# Altium PCB PCB_LSH-120.PcbDoc
Units mil, origin at the board's own origin, x right, y up, seen from the top; angles counter-clockwise.
Board outline 1950 x 3050 mil, 2 copper layers (Top Layer, Bottom Layer), stack 62.8 mil thick; 33 components, 47 nets, 171 pads, 35 vias.
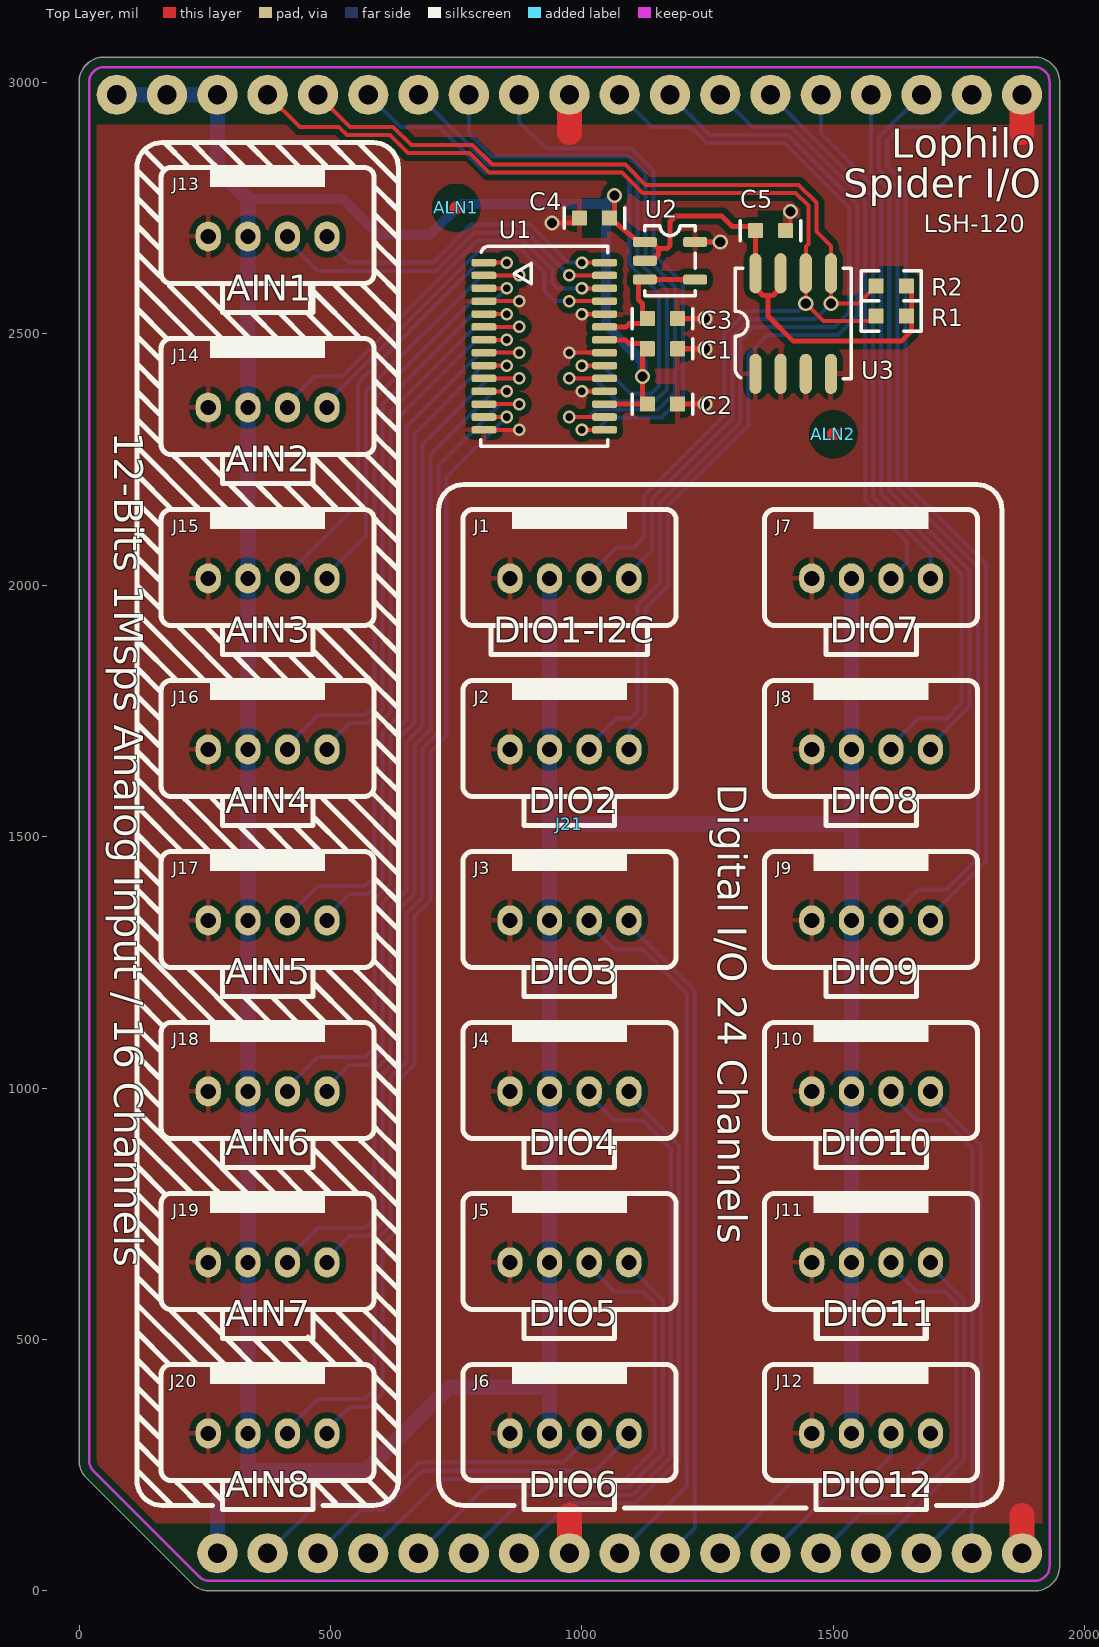
[diagram p0: Top Layer view]
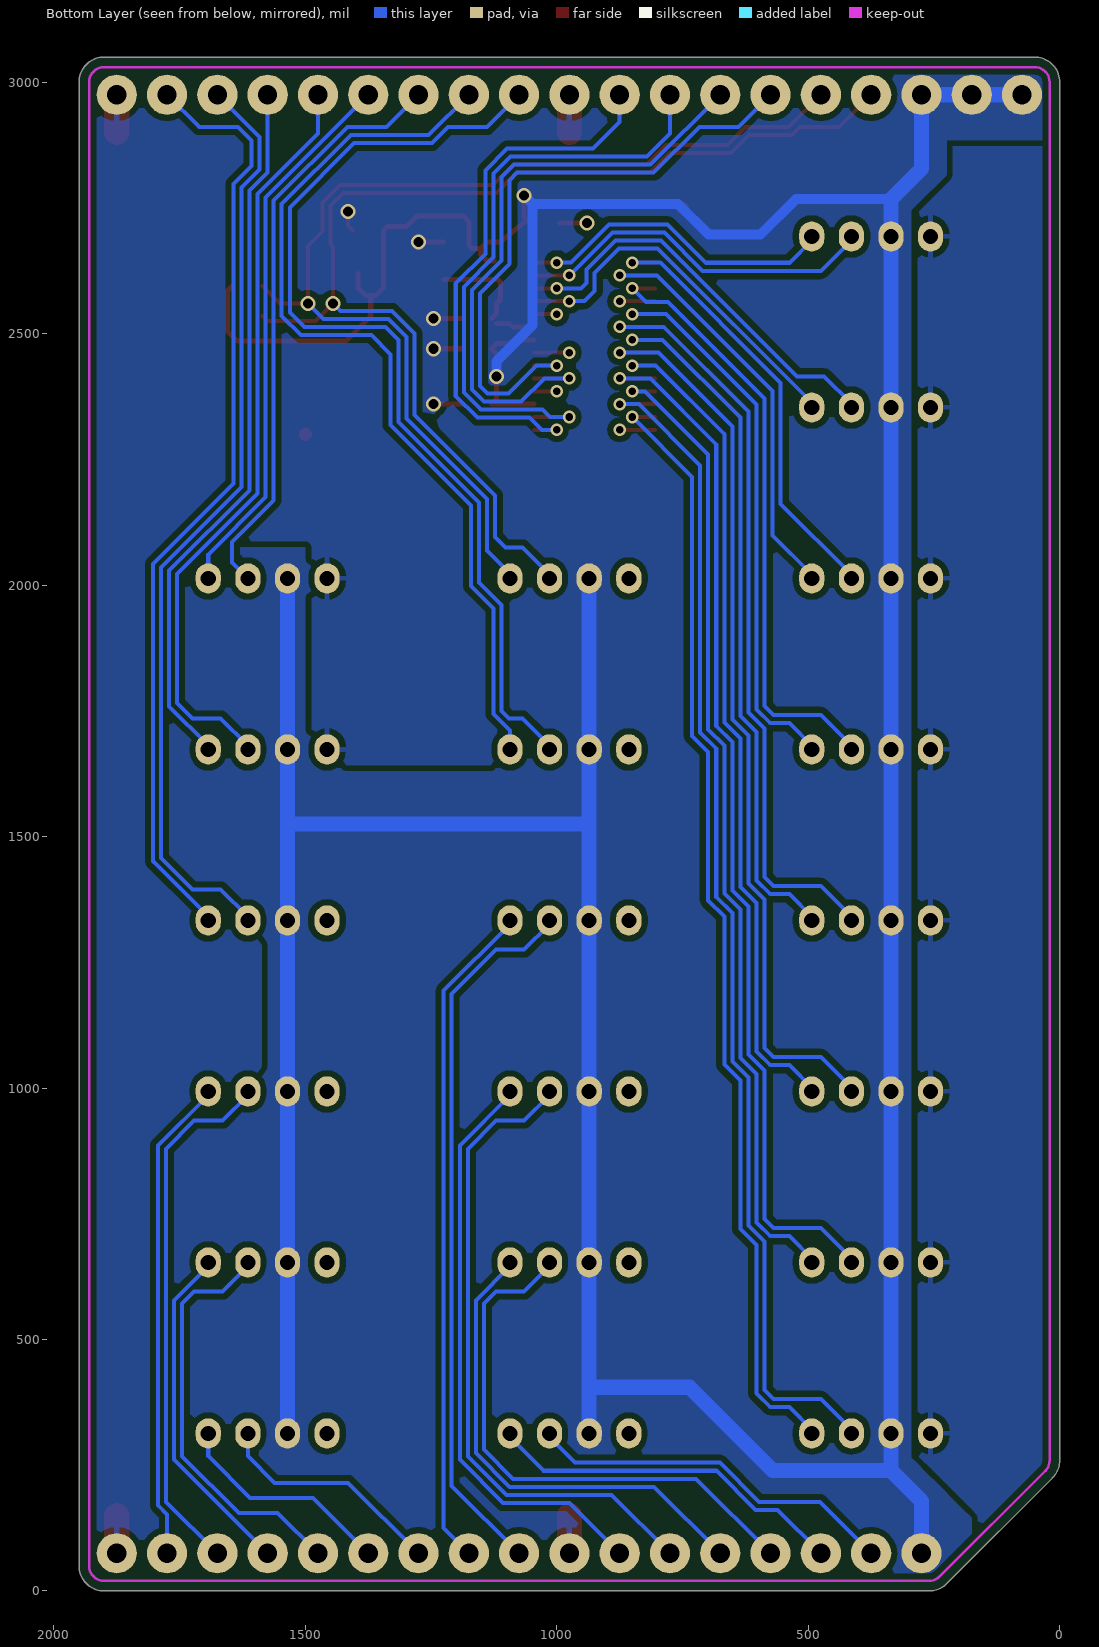
[diagram p1: Bottom Layer view, seen from below]

## Layer stack, top to bottom
Top Layer: signal copper 1.4
Dielectric: core 60, FR-4 S1170, Dk 4.8
Bottom Layer: signal copper 1.4

## Board outline
14.64,224.64 cw(c50,260) 0,260 0,3000 cw(c50,3000) 50,3050 1900,3050 cw(c1900,3000) 1950,3000 1950,50 cw(c1900,50) 1900,0 260,0 cw(c260,50) 224.64,14.64

## Design rules (kind name [scope] priority, off if disabled: settings)
Clearance AlignClearance [(HasFootprint('ALIGN_1')) vs (IsRegion)] p1: gap=35
Clearance RegionClearance [(IsRegion)] p2: gap=12
Clearance KeepOut_Type [All vs (OnLayer('Keep-Out Layer'))] p3: gap=4
Clearance All_Type [All] p4: gap=8
ComponentClearance [All] p1 off: gap=10 collisioncheckmode=3 verticalgap=10 showdistances=FALSE
FabricationTestPointUsage TestPointUsage [All] p1: valid=0 allowmultiple=FALSE
FabricationTestpoint Testpoint [(IsPad And (OnTopLayer Or OnBottomLayer))] p1: side=3 testpointundercomponent=TRUE minsize=40 maxsize=100 preferedsize=60 minholesize=20 maxholesize=40 preferedholesize=32 testpointgrid=1 allowsidetop=TRUE allowsidebottom=TRUE usegrid=TRUE gridtolerance=0.01
Height [All] p1 off: minheight=0 maxheight=1000 prefheight=500
HoleSize [All] p1: absolutevalues=TRUE maxlimit=300 minlimit=8 maxpercent=80.000 minpercent=20.000
HoleToHoleClearance [All] p1: gap=12 allowstackedmicrovias=TRUE
MinimumSolderMaskSliver MinimumSolderMaskSliver_Logo [(HasFootprint('LOGO_METEROI_ST_12X3')) vs (HasFootprint('LOGO_METEROI_ST_12X3'))] p1: minsoldermaskwidth=0
MinimumSolderMaskSliver [All] p2: minsoldermaskwidth=5
PasteMaskExpansion [All] p1: expansion=1
PlaneClearance [All] p1: clearance=10
PlaneConnect [All] p1: planeconnectstyle=Direct reliefexpansion=6 reliefentries=4 reliefconductorwidth=6 reliefairgap=6
PolygonConnect PolygonConnect_PAD [All vs (ObjectKind = 'Pad') And (Net = 'VSS')] p1: connectstyle=Relief reliefconductorwidth=10 reliefentries=4 polygonreliefangle="90 Angle"
PolygonConnect [All] p2: connectstyle=Direct reliefconductorwidth=6 reliefentries=4 polygonreliefangle="90 Angle"
RoomDefinition 01_LSH-120 [InComponentClass('01_LSH-120')] p1: confinementstyle=ConfineIn formatcopy=TRUE lockcomponents=FALSE outline -6150,-3500 -4150,-3500 -4150,-2500 -6150,-2500
RoutingVias [All] p1: holewidth=12 width=20 viastyle="Through Hole" minholewidth=12 minwidth=20 maxholewidth=280 maxwidth=500
SilkToSilkClearance [All] p1: silktosilkclearance=0
SilkscreenOverComponentPads [All] p1: minsilkscreentomaskgap=0
SolderMaskExpansion [All] p1: expansion=1
ViasUnderSMD [All] p1: allowed=TRUE
Width Width_Logo [(HasFootprint('LOGO_METEROI_ST_12X3'))] p1: maxlimit=100 minlimit=0.1 preferedwidth=10
Width [All] p2: maxlimit=200 minlimit=6 preferedwidth=6
16 further rules are at their usual default settings.

## Components (designator, comment, footprint, x,y, rotation, side; value= is the part's Value field where it differs from the comment)
ALN1 "Assembly Optical Align" ALIGN_1 750,2750 r0 top
ALN2 "Assembly Optical Align" ALIGN_1 1500,2300 r0 top
C1 "100 nF" 0603A1 1160,2470 r180 top
C2 "100 nF" 0603A1 1160,2360 r180 top
C3 "100 nF" 0603A1 1160,2530 r180 top
C4 "100 nF" 0603A1 1025,2730 r0 top
C5 "100 nF" 0603A1 1375,2705 r180 top
J1 "GROVE_CON" PHB-4A 975,2035 r180 top locked
J2 "GROVE_CON" PHB-4A 975,1695 r180 top locked
J3 "GROVE_CON" PHB-4A 975,1355 r180 top locked
J4 "GROVE_CON" PHB-4A 975,1015 r180 top locked
J5 "GROVE_CON" PHB-4A 975,675 r180 top locked
J6 "GROVE_CON" PHB-4A 975,335 r180 top locked
J7 "GROVE_CON" PHB-4A 1575,2035 r180 top locked
J8 "GROVE_CON" PHB-4A 1575,1695 r180 top locked
J9 "GROVE_CON" PHB-4A 1575,1355 r180 top locked
J10 "GROVE_CON" PHB-4A 1575,1015 r180 top locked
J11 "GROVE_CON" PHB-4A 1575,675 r180 top locked
J12 "GROVE_CON" PHB-4A 1575,335 r180 top locked
J13 "GROVE_CON" PHB-4A 375,2715 r180 top locked
J14 "GROVE_CON" PHB-4A 375,2375 r180 top locked
J15 "GROVE_CON" PHB-4A 375,2035 r180 top locked
J16 "GROVE_CON" PHB-4A 375,1695 r180 top locked
J17 "GROVE_CON" PHB-4A 375,1355 r180 top locked
J18 "GROVE_CON" PHB-4A 375,1015 r180 top locked
J19 "GROVE_CON" PHB-4A 375,675 r180 top locked
J20 "GROVE_CON" PHB-4A 375,335 r180 top locked
J21 "LOP_SHIELD" LOP_SHIELD_MOD 0,0 r0 top locked
R1 "4.7 K" 0603A2 1615,2535 r0 top
R2 "4.7 K" 0603A2 1615,2595 r0 top
U1 "AMC7891" TSSOP-28 925,2475 r0 top locked
U2 "ADR391A" SOT-23-5 1175,2645 r0 top
U3 "64Kbit I2C" SOIC-8S 1420,2520 r90 top

## Footprints (in the part's own frame and the unit in brackets; to place one, negate y for a bottom-side part, rotate by r counter-clockwise, add the part's x,y. Pads: shape width x height; smd on the part's side, far side on the other; paste and mask are expansions set on the pad)
0603A1 [mil]
  rrect15% 30x30 smd paste-2: 1(-30,0) 2(30,0)
  Top Layer pour cut-out: -25,40 25,40 25,-40 -25,-40
  silkscreen extent -60,-20 60,20, body extent -31,-16 31,16, height 31
0603A2 [mil]
  rrect15% 30x30 smd paste-2: 1(-30,0) 2(30,0)
  Top Layer pour cut-out: -25,40 25,40 25,-40 -25,-40
  silkscreen extent -60,-30 60,30, body extent -31,-15 31,15, height 11
ALIGN_1 [mil]
  Top Layer circle w16: c0,0 r5
LOP_SHIELD_MOD [mil]
  round 80 hole 38: 1(275,75) 2(375,75) 3(475,75) 4(575,75) 5(675,75) 6(775,75) 7(875,75) 8(975,75) 9(1075,75) 10(1175,75) 11(1275,75) 12(1375,75) 13(1475,75) 14(1575,75) 15(1675,75) 16(1775,75) 17(1875,75) 18(1875,2975) 19(1775,2975) 20(1675,2975) 21(1575,2975) 22(1475,2975) 23(1375,2975) 24(1275,2975) 25(1175,2975) 26(1075,2975) 27(975,2975) 28(875,2975) 29(775,2975) 30(675,2975) 31(575,2975) 32(475,2975) 33(375,2975) 34(275,2975) 35(175,2975) 36(75,2975)
  body extent 25,25 1925,3025, height 39
PHB-4A [mil]
  oval 50x60 hole 30: 1(-118.11,21.65) 2(-39.37,21.65) 3(39.37,21.65) 4(118.11,21.65)
  silkscreen extent -212,-115 212,115, body extent -197,-100 197,100, height 323
SOIC-8S [mil]
  oval 80x24 smd paste-2: 1(-100,75) 2(-100,25) 3(-100,-25) 4(-100,-75) 5(100,-75) 6(100,-25) 7(100,25) 8(100,75)
  silkscreen extent -110,-115 110,115, body extent -125,-100 125,100, height 61
SOT-23-5 [mil]
  rrect50% 48x20 smd: 1(-50,37.4) 2(-50,0) 3(-50,-37.4) 4(50,-37.4) 5(50,37.4)
  silkscreen extent -50,-70 50,70, body extent -56,-57 56,57, height 40
TSSOP-28 [mil]
  rrect60% 50x15 smd: 1(-120,166.34) 2(-120,140.75) 3(-120,115.16) 4(-120,89.57) 5(-120,63.98) 6(-120,38.39) 7(-120,12.8) 8(-120,-12.8) 9(-120,-38.39) 10(-120,-63.98) 11(-120,-89.57) 12(-120,-115.16) 13(-120,-140.75) 14(-120,-166.34) 15(120,-166.34) 16(120,-140.75) 17(120,-115.16) 18(120,-89.57) 19(120,-63.98) 20(120,-38.39) 21(120,-12.8) 22(120,12.8) 23(120,38.39) 24(120,63.98) 25(120,89.57) 26(120,115.16) 27(120,140.75) 28(120,166.34)
  silkscreen extent -126,-199 126,199, body extent -126,-179 126,179, height 48

## Part data
ALN1 ALN2: library part ALIGN
C1 C2 C3 C4 C5: library part CAP, "Normal Capacitor"
J1 J2 J3 J4 J5 J6 J7 J8 J9 J10 J11 J12 J13 J14 J15 J16 J17 J18 J19 J20: "Grove Connector"
J21: library part LOP_SHIELD_MOD, "Lophilo Shield Module Slot"
R1 R2: library part RES, "Normal Resistor"
U1: library part AD7490, "16 Inputs MUX ADC / 12-Bit 1Msps"
U2: library part ADR391, "16 Inputs MUX ADC / 12-Bit 1Msps"
U3: library part ROM_I2C_A, "Generic 24 Series I2C ROM"

## Via types
v1: diameter 25, hole 15, Top Layer to Bottom Layer, tented both sides, 25 vias
v2: diameter 30, hole 20, Top Layer to Bottom Layer, tented both sides, 10 vias

## Nets (pads, with @x,y where several pads share a name; then routed paths per layer and width w, separated by ;. In a path a pad name is that pad's centre, name@x,y a point inside that pad or via, vN(x,y) a via of type N, cw(c..) or ccw(c..) an arc to the next point about the centre after c; other vN are vias at no path point)
ADC-CSN: J21.31 U1.20 | length 1250.1
  Top Layer w8: v1(1000,2436.61) U1.20
  Bottom Layer w8: J21.31 639,2911 716.37,2911 807.37,2820 1079,2820 1094,2805 1094,2639 1153,2580 1153,2396 1138,2381 1096,2381 1040.39,2436.61 v1(1000,2436.61)
ADC-SCLK: J21.29 U1.16 | length 1221.3
  Top Layer w8: v1(975,2334.25) U1.16
  Bottom Layer w8: J21.29 775,2897.63 820.63,2852 1092.25,2852 1126,2818.25 1126,2652.25 1185,2593.25 1185,2382.75 1151.25,2349 1028.75,2349 1014,2334.25 v1(975,2334.25)
ADC-SDI: J21.30 U1.19 | length 1242.5
  Top Layer w8: v1(975,2411.02) U1.19
  Bottom Layer w8: J21.30 814,2836 1085.63,2836 1110,2811.63 1110,2645.63 1169,2586.63 1169,2389.37 1144.63,2365 1071.02,2365 1025,2411.02 v1(975,2411.02)
ADC-SDO: J21.28 U1.15 | length 1108
  Top Layer w8: v1(1000,2308.66) U1.15
  Bottom Layer w8: J21.28 875,2921 928,2868 1098.88,2868 1142,2824.88 1142,2658.88 1201,2599.88 1201,2376.12 1157.88,2333 1054,2333 1029.66,2308.66 v1(1000,2308.66)
AIN-A1: J13.1 U1.28 | length 640.9
  Top Layer w8: v1(1000,2641.34) U1.28
  Bottom Layer w8: J13.1 493.11,2685.63 537.74,2641 703.49,2641 779.49,2717 896.38,2717 972.04,2641.34 v1(1000,2641.34)
AIN-A2: J14.1 U1.25 | length 752.2
  Top Layer w8: v1(975,2564.57) U1.25
  Bottom Layer w8: J14.1 493.11,2362.74 799.37,2669 876.49,2669 925,2620.49 925,2585 945.43,2564.57 v1(975,2564.57)
AIN-A3: J15.1 U1.2 | length 874.1
  Top Layer w8: U1.2 v1(875,2615.75)
  Bottom Layer w8: J15.1 493.11,2021.06 571,2098.95 571,2386 800.75,2615.75 v1(875,2615.75)
AIN-A4: J16.1 U1.5 | length 1119.9
  Top Layer w8: U1.5 v1(850,2538.98)
  Bottom Layer w8: J16.1 493.11,1681.06 537.74,1725.69 575.63,1725.69 603,1753.07 603,2359 782.98,2538.98 v1(850,2538.98)
AIN-A5: J17.1 U1.7 | length 1404.7
  Top Layer w8: U1.7 v1(850,2487.8)
  Bottom Layer w8: J17.1 493.11,1341.06 537.74,1385.69 575.63,1385.69 603,1413.07 603,1707.81 635,1739.81 635,2333 789.8,2487.8 v1(850,2487.8)
AIN-A6: J18.1 U1.9 | length 1685.5
  Top Layer w8: U1.9 v1(850,2436.61)
  Bottom Layer w8: J18.1 493.11,1001.06 537.74,1045.69 575.63,1045.69 603,1073.07 603,1367.81 635,1399.81 635,1694.56 667,1726.56 667,2300 803.61,2436.61 v1(850,2436.61)
AIN-A7: J19.1 U1.11 | length 1962.1
  Top Layer w8: U1.11 v1(850,2385.43)
  Bottom Layer w8: J19.1 493.11,661.06 537.74,705.69 575.63,705.69 603,733.07 603,1027.81 635,1059.81 635,1354.56 667,1386.56 667,1681.3 699,1713.3 699,2260 824.43,2385.43 v1(850,2385.43)
AIN-A8: J20.1 U1.13 | length 2235.9
  Top Layer w8: U1.13 v1(850,2334.25)
  Bottom Layer w8: J20.1 493.11,321.06 537.74,365.69 575.63,365.69 603,393.07 603,687.81 635,719.81 635,1014.56 667,1046.56 667,1341.3 699,1373.3 699,1668.05 731,1700.05 731,2215.25 v1(850,2334.25)
AIN-B1: J13.2 U1.27 | length 730.3
  Top Layer w8: v1(975,2615.75) U1.27
  Bottom Layer w8: J13.2 414.37,2685.63 475,2625 710.12,2625 786.12,2701 889.75,2701 v1(975,2615.75)
AIN-B2: J14.2 U1.26 | length 833
  Top Layer w8: v1(1000,2590.16) U1.26
  Bottom Layer w8: J14.2 414.37,2361.06 468.31,2415 522.75,2415 792.75,2685 883.12,2685 ; 877.19,2685 883.12,2685 ; v1(1000,2590.16) 951.84,2590.16 941,2601 941,2627.12 883.12,2685
AIN-B3: J15.2 U1.1 | length 886
  Top Layer w8: U1.1 v1(850,2641.34)
  Bottom Layer w8: J15.2 414.37,2021.06 555,2161.69 555,2402 794.34,2641.34 v1(850,2641.34)
AIN-B4: J16.2 U1.3 | length 1223
  Top Layer w8: U1.3 v1(850,2590.16)
  Bottom Layer w8: J16.2 414.37,1681.06 475,1741.69 569,1741.69 587,1759.69 587,2371 779,2563 822.84,2563 v1(850,2590.16)
AIN-B5: J17.2 U1.6 | length 1547.2
  Top Layer w8: U1.6 v1(875,2513.39)
  Bottom Layer w8: J17.2 414.37,1341.06 475,1401.69 569,1401.69 587,1419.69 587,1714.44 619,1746.44 619,2345 787.39,2513.39 v1(875,2513.39)
AIN-B6: J18.2 U1.8 | length 1829.7
  Top Layer w8: U1.8 v1(875,2462.2)
  Bottom Layer w8: J18.2 414.37,1001.06 475,1061.69 569,1061.69 587,1079.69 587,1374.44 619,1406.44 619,1701.18 651,1733.18 651,2315 798.2,2462.2 v1(875,2462.2)
AIN-B7: J19.2 U1.10 | length 2109.3
  Top Layer w8: U1.10 v1(875,2411.02)
  Bottom Layer w8: J19.2 414.37,661.06 475,721.69 569,721.69 587,739.69 587,1034.44 619,1066.44 619,1361.18 651,1393.18 651,1687.93 683,1719.93 683,2280 814.02,2411.02 v1(875,2411.02)
AIN-B8: J20.2 U1.12 | length 2384.7
  Top Layer w8: U1.12 v1(875,2359.84)
  Bottom Layer w8: J20.2 414.37,321.06 475,381.69 569,381.69 587,399.69 587,694.44 619,726.44 619,1021.18 651,1053.18 651,1347.93 683,1379.93 683,1674.67 715,1706.67 715,2238 836.84,2359.84 v1(875,2359.84)
I2C-SCL-IOB1: J1.2 J21.33 R1.1 U3.6 | length 2326.1
  Top Layer w8: J21.33 439,2911 516.37,2911 532.37,2895 618,2895 654,2859 776,2859 815,2820 1080,2820 1120,2780 1424.37,2780 1450,2754.37 1450,2678 1445,2673 U3.6 v2(1445,2560) 1480,2525 1575,2525 R1.1
  Bottom Layer w8: J1.2 1014.37,2021.06 1068.31,2075 1102,2075 1123,2096 1123,2178 1283,2338 1283,2500.25 1327.75,2545 1430,2545 v2(1445,2560)
I2C-SDA-IOA1: J1.1 J21.32 R2.1 U3.5 | length 2186.2
  Top Layer w8: J21.32 539,2911 624.63,2911 660.63,2875 782.63,2875 821.63,2836 1086.63,2836 1126.63,2796 1431,2796 1466,2761 1466,2703 1495,2674 U3.5 v2(1495,2560) 1550,2560 R2.1
  Bottom Layer w8: J1.1 1093.11,2022.74 1139,2068.63 1139,2171.37 1299,2331.37 1299,2493.63 1334.37,2529 1464,2529 v2(1495,2560)
IOA2: J2.1 J21.25 | length 1817.6
  Bottom Layer w8: J2.1 1093.11,1710.48 1126,1743.37 1126,1953.37 1171,1998.37 1171,2158.12 1331,2318.12 1331,2459 1369,2497 1508.63,2497 1547,2535.37 1547,2757.75 1409.75,2895 1255,2895 J21.25 J21.25@1174,2974
IOA3: J3.1 J21.10 | length 1333.7
  Bottom Layer w8: J3.1 1093.11,1325.63 1225,1193.74 1225,125 J21.10
IOA4: J4.1 J21.7 | length 1168.7
  Bottom Layer w8: J21.7 975,175 1106.88,175 1193,261.12 1193,885.74 1093.11,985.63 J4.1
IOA5: J5.1 J21.5 | length 975.7
  Bottom Layer w8: J21.5 807,207 1093.63,207 1161,274.37 1161,577.74 1093.11,645.63 J5.1
IOA6: J6.1 J21.3 | length 721.4
  Bottom Layer w8: J21.3 561,161 604.63,161 682.63,239 1026.48,239 1093.11,305.63 J6.1
IOA7: J7.1 J21.23 | length 1093.4
  Bottom Layer w8: J21.23 1579,2771 1579,2175.37 1693.11,2061.26 J7.1
IOA8: J8.1 J21.21 | length 1415.1
  Bottom Layer w8: J21.21 1575,2820.25 1611,2784.25 1611,2188.63 1771,2028.63 1771,1758.95 1693.11,1681.06 J8.1
IOA9: J9.1 J21.19 | length 1883.3
  Bottom Layer w8: J9.1 1693.11,1341.06 1803,1450.95 1803,2041.88 1643,2201.88 1643,2797.51 1607,2833.51 1607,2884.37 1633.63,2911 1711,2911 J21.19
IOA10: J10.1 J21.16 | length 967.2
  Bottom Layer w8: J10.1 1693.11,985.63 1793,885.74 1793,170.37 1775,152.37 J21.16
IOA11: J11.1 J21.14 | length 683.5
  Bottom Layer w8: J21.14 1761,261 1761,300 1761,577.74 1693.11,645.63 J11.1
IOA12: J12.1 J21.12 | length 443.3
  Bottom Layer w8: J21.12 1485,185 1610,185 1693.11,268.11 J12.1
IOB2: J2.2 J21.26 | length 1950.4
  Bottom Layer w8: J2.2 1014.37,1681.06 1068.31,1735 1095,1735 1110,1750 1110,1960 1155,2005 1155,2164.75 1315,2324.75 1315,2487 1341,2513 1502,2513 1531,2542 1531,2751.12 1403.12,2879 1248.37,2879 1216.37,2911 1139,2911 J21.26
IOB3: J3.2 J21.9 | length 1427.3
  Bottom Layer w8: J3.2 1014.37,1325.63 1065,1275 1121.11,1275 1209,1187.11 1209,1131 1209,209 J21.9
IOB4: J4.2 J21.6 | length 1307.7
  Bottom Layer w8: J21.6 891,191 1100.25,191 1177,267.75 1177,879.11 1121.11,935 1065,935 1014.37,985.63 J4.2
IOB5: J5.2 J21.4 | length 1114.7
  Bottom Layer w8: J21.4 723,223 1087,223 1145,281 1145,571.11 1121.11,595 1065,595 1014.37,645.63 J5.2
IOB6: J6.2 J21.2 | length 742.6
  Bottom Layer w8: J21.2 477,177 598,177 676,255 963.74,255 1014.37,305.63 J6.2
IOB7: J7.2 J21.24 | length 1173.6
  Bottom Layer w8: J21.24 1339,2911 1416.37,2911 1563,2764.37 1563,2168.75 1645.87,2085.87 1645.87,2044.85 J7.2
IOB8: J8.2 J21.22 | length 1508.8
  Bottom Layer w8: J21.22 1475,2897.63 1595,2777.63 1595,2182 1755,2022 1755,1765.58 1724.42,1735 1668.31,1735 1614.37,1681.06 J8.2
IOB9: J9.2 J21.20 | length 1862
  Bottom Layer w8: J9.2 1614.37,1341.06 1668.31,1395 1724.42,1395 1787,1457.58 1787,2035.25 1627,2195.25 1627,2790.88 1591,2826.88 1591,2891 J21.20
IOB10: J10.2 J21.15 | length 1060.8
  Bottom Layer w8: J10.2 1614.37,985.63 1665,935 1721.11,935 1777,879.11 1777,823 1777,177 J21.15
IOB11: J11.2 J21.13 | length 822.5
  Bottom Layer w8: J21.13 1555,155 1632.37,155 1745,267.63 1745,571.11 1721.11,595 1665,595 1614.37,645.63 J11.2
IOB12: J12.2 J21.11 | length 464.6
  Bottom Layer w8: J21.11 1415,215 1561.26,215 1614.37,268.11 J12.2
NetC3_2: C3.2 U1.23 U2.3 U2.4 | length 272.5
  Top Layer w10: U1.23 1087.39,2513.39 1094,2520 C3.2@1120,2520 ; C3.2 1120,2540 1120,2560 1112,2568 1112,2602 1117.6,2607.6 U2.3 U2.4
VDD5V: C1.2 C2.2 C4.2 C5.2 J1.3 J2.3 J3.3 J4.3 J5.3 J6.3 J7.3 J8.3 J9.3 J10.3 J11.3 J12.3 J13.3 J14.3 J15.3 J16.3 J17.3 J18.3 J19.3 J20.3 J21.1 J21.34 J21.35 J21.36 R1.2 R2.2 U1.17 U1.22 U2.1 U2.2 U3.7 U3.8 | length 10422.2
  Top Layer w10: U1.17 1129.84,2359.84 C2.2 1120,2370 v2(1120,2415) 1120,2460 C1.2 1120,2480 1094,2480 1086.2,2487.8 U1.22 ; C4.2@1055,2720 C4.2@1060,2725 ; v2(1065,2775) 1065,2730 C4.2@1060,2725 ; U2.2 1139.4,2645 1152,2657.6 1152,2669 ; 1370,2576 1370,2535 1420,2485 1635,2485 1655,2505 1655,2585 R2.2 ; U3.7 1395,2591 1380,2576 1360,2576 1345,2591 U3.8 C5.2 1337,2713 1299,2713 1278,2734 1186,2734 1175,2723 1175,2675 1169,2669 1152,2669 ; C4.2@1060,2725 C4.2 1112.6,2682.4 U2.1 1138.6,2682.4 1152,2669
  Bottom Layer w20: 335.63,2767.37 524.63,2767.37 595,2697 698,2697 759,2758 1048,2758 ; v2(1065,2775) 1048,2758 ; v2(1120,2415) 1120,2445 1048,2517 1048,2758
  Bottom Layer w30: J21.36 J21.35 J21.34 275,2828 335.63,2767.37 J13.3 J14.3 J15.3 J16.3 J17.3 J18.3 J19.3 J20.3 335.63,239.63 ; J21.1 275,179 335.63,239.63 ; J6.3 935.63,405 ; J1.3 J2.3 935.63,1525 ; J12.3 J11.3 J10.3 J9.3 1535.63,1525 ; J7.3 J8.3 1535.63,1525 ; 335.63,239.63 570.63,239.63 736,405 935.63,405 ; 935.63,405 J5.3 J4.3 J3.3 935.63,1525 ; 935.63,1525 1535.63,1525
VSS: C1.1 C2.1 C3.1 C4.1 C5.1 J1.4 J2.4 J3.4 J4.4 J5.4 J6.4 J7.4 J8.4 J9.4 J10.4 J11.4 J12.4 J13.4 J14.4 J15.4 J16.4 J17.4 J18.4 J19.4 J20.4 J21.8 J21.17 J21.18 J21.27 U1.4 U1.14 U1.18 U1.21 U1.24 U2.5 U3.1 U3.2 U3.3 U3.4 | length 912.1
  Top Layer w8: U1.14 v1(875,2308.66) ; U1.4 v1(875,2564.57) ; v1(975,2462.2) U1.21 ; v1(1000,2385.43) U1.18 ; v1(1000,2538.98) U1.24 ; C5.1 1415,2715 v2(1415,2743)
  Top Layer w10: v2(940,2720) C4.1@995,2720 ; C2.1 v2(1245,2360) ; C1.1 v2(1245,2470) ; C3.1 v2(1245,2530) ; U2.5 v2(1275,2682.4)
  Top Layer w50: J21.8 975,150 ; 975,2900 J21.27 ; J21.17 1875,150 ; 1875,2900 J21.18

## Polygon pours and split planes (outlines as drawn)
VDD5V on Bottom Layer "FILL-VDD5V" (solid, remove dead copper, pour order 1000): -5,3050 -5,2885 205,2885 220,2885 225,2885 225,2865 225,2815 285,2755 295,2745 295,2715 295,265 240,210 175,145 175,70 175,0 325,0 375,0 1575,0 1575,2075 1325,2075 1325,2568.88 1246.32,2647.56 1175,2718.88 1175,2905 1175,3050
VSS on Bottom Layer "FILL-VSS" (solid, remove dead copper, pour order 1001): -5,3045 -5,250 245,0 285,0 1955,0 1955,3045
VDD5V on Bottom Layer "FILL" (solid, remove dead copper, pour order 1002): 1325,2075 1930,2075 1930,1915 1930,185 1920,175 1325,175
VSS on Top Layer "FILL" (solid, remove dead copper): -15,2915 1965,2915 1965,135 1850,135 80,135 -5,220 -15,230 -15,2860

## Keep-outs
Keep-Out Layer:
  lines w5: 20,260 ccw(c50,260) 28.79,238.79 238.79,28.79 ccw(c260,50) 260,20 1900,20 ccw(c1900,50) 1930,50 1930,3000 ccw(c1900,3000) 1900,3030 50,3030 ccw(c50,3000) 20,3000 20,260

## Other copper
Top Layer:
  pour cut-out: 0,2915 1945,2915 1945,3050 0,3050
  pour cut-out: 1950,135 95,135 95,5 1950,5

## Silkscreen, mask and mechanical layers (free items; w line width, h text height)
Top Overlay:
  drawing of 236 lines, arcs and shapes, not listed
  text "Lophilo" at 1615,2830 h100
  text "Spider I/O" at 1520,2750 h100
  text "LSH-120" at 1680,2690 h60
  text "AIN1" at 293,2548 h90
  text "12-Bits 1Msps Analog Input / 16 Channels" at 50,2305 h100 r270
  text "AIN2" at 291,2208 h90
  text "AIN3" at 291,1868 h90
  text "DIO1-I2C" at 824,1868 h90
  text "DIO7" at 1493,1868 h90
  text "Digital I/O 24 Channels" at 1250,1605 h100 r270
  text "AIN4" at 291,1528 h90
  text "DIO2" at 893,1528 h90
  text "DIO8" at 1493,1528 h90
  text "AIN5" at 291,1188 h90
  text "DIO3" at 893,1188 h90
  text "DIO9" at 1493,1188 h90
  text "AIN6" at 291,848 h90
  text "DIO4" at 893,848 h90
  text "DIO10" at 1473,848 h90
  text "AIN7" at 291,508 h90
  text "DIO5" at 893,508 h90
  text "DIO11" at 1477,508 h90
  text "AIN8" at 291,168 h90
  text "DIO6" at 893,168 h90
  text "DIO12" at 1473,168 h90
Mechanical 1:
  the board outline again, w5
Mechanical 32:
  drawing of 1984 lines, arcs and shapes, not listed
  text "1" at -2670,4125 h50
  text "2" at -1670,4125 h50
  text "3" at -670,4125 h50
  text "4" at 330,4125 h50
  text "5" at 1330,4125 h50
  text "6" at 2330,4125 h50
  text "7" at 3330,4125 h50
  text "8" at 4330,4125 h50
  text "F" at -3215,3950 h50
  text "F" at 4885,3950 h50
  text "PCB.Service@meteroi.com" at 4640,3010 h100 r90
  text "208 One Meteroi Dr." at 4730,3010 h100 r90
  text "Shanghai 200233, China" at 4820,3010 h100 r90
  text "E" at -3215,2950 h50
  text "E" at 4885,2950 h50
  text "D" at -3215,1950 h50
  text "D" at 4885,1950 h50
  text "C" at -3215,950 h50
  text "C" at 4885,950 h50
  text "B" at -3215,-50 h50
  text "B" at 4885,-50 h50
  text "xxxxxxxxx@meteroi.com" at 4660,-460 h120 r90
  text "xxxxxxxxx@meteroi.com" at 4810,-460 h120 r90
  text "A" at -3215,-1050 h50
  text "A" at 4885,-1050 h50
  text "Your Name" at 4660,-1070 h120 r90
  text "Your Name" at 4810,-1070 h120 r90
  text "Title:" at -3110,-1280 h80
  text "Sheet:" at -10,-1280 h80
  text "Size:" at 590,-1280 h80
  text "Layer:" at 890,-1280 h80
  text "Rev:" at 1740,-1280 h80
  text "D/N:" at 2040,-1280 h80
  text "P/N:" at 2890,-1280 h80
  text "S/N:" at 3590,-1280 h80
  text "0" at 1900,-1310 h120
  text "420-XXXDDD" at 2220,-1310 h120
  text "XXX-DDD" at 3070,-1310 h120
  text "HDNYYMMDDNN" at 3770,-1310 h120
  text "The Title of the Document" at -2900,-1330 h150
  text "Project:" at -3110,-1430 h80
  text "Size:" at -1000,-1430 h80
  text "Date:" at 1740,-1430 h80
  text "Template Ver:" at 2590,-1430 h80
  text "Unit:" at 3240,-1430 h80
  text "Scale:" at 3690,-1430 h80
  text "The Project's Name" at -2850,-1450 h100
  text "00.0 mm X 00.0 mm" at -830,-1450 h100
  text "of" at 220,-1450 h80
  text "00" at 10,-1460 h200
  text "00" at 310,-1460 h200
  text "B" at 680,-1460 h250
  text "CONFIDENTIAL" at 890,-1460 h120
  text "05-01-2011" at 1940,-1460 h120
  text "1.0" at 3050,-1460 h100
  text "Inch" at 3430,-1460 h100
  text "DO NOT SCALE" at 3920,-1460 h100
  text "Designer:" at 4630,-1460 h80 r90
  text "Engineering:" at 4780,-1460 h80 r90
  text "1" at -2670,-1575 h50
  text "2" at -1670,-1575 h50
  text "3" at -670,-1575 h50
  text "4" at 330,-1575 h50
  text "5" at 1330,-1575 h50
  text "6" at 2330,-1575 h50
  text "7" at 3330,-1575 h50
  text "8" at 4330,-1575 h50